# Altium PCB hat_template 2021V3.PcbDoc (part 2 of 2)
Units mm, origin at the board's own origin, x right, y up, seen from the top; angles counter-clockwise.
Board outline 64 x 85 mm, 4 copper layers (Top Side, Ground Plane, Power Plane, Bottom Side), stack 0.844 mm thick; 109 components, 93 nets, 378 pads, 126 vias.
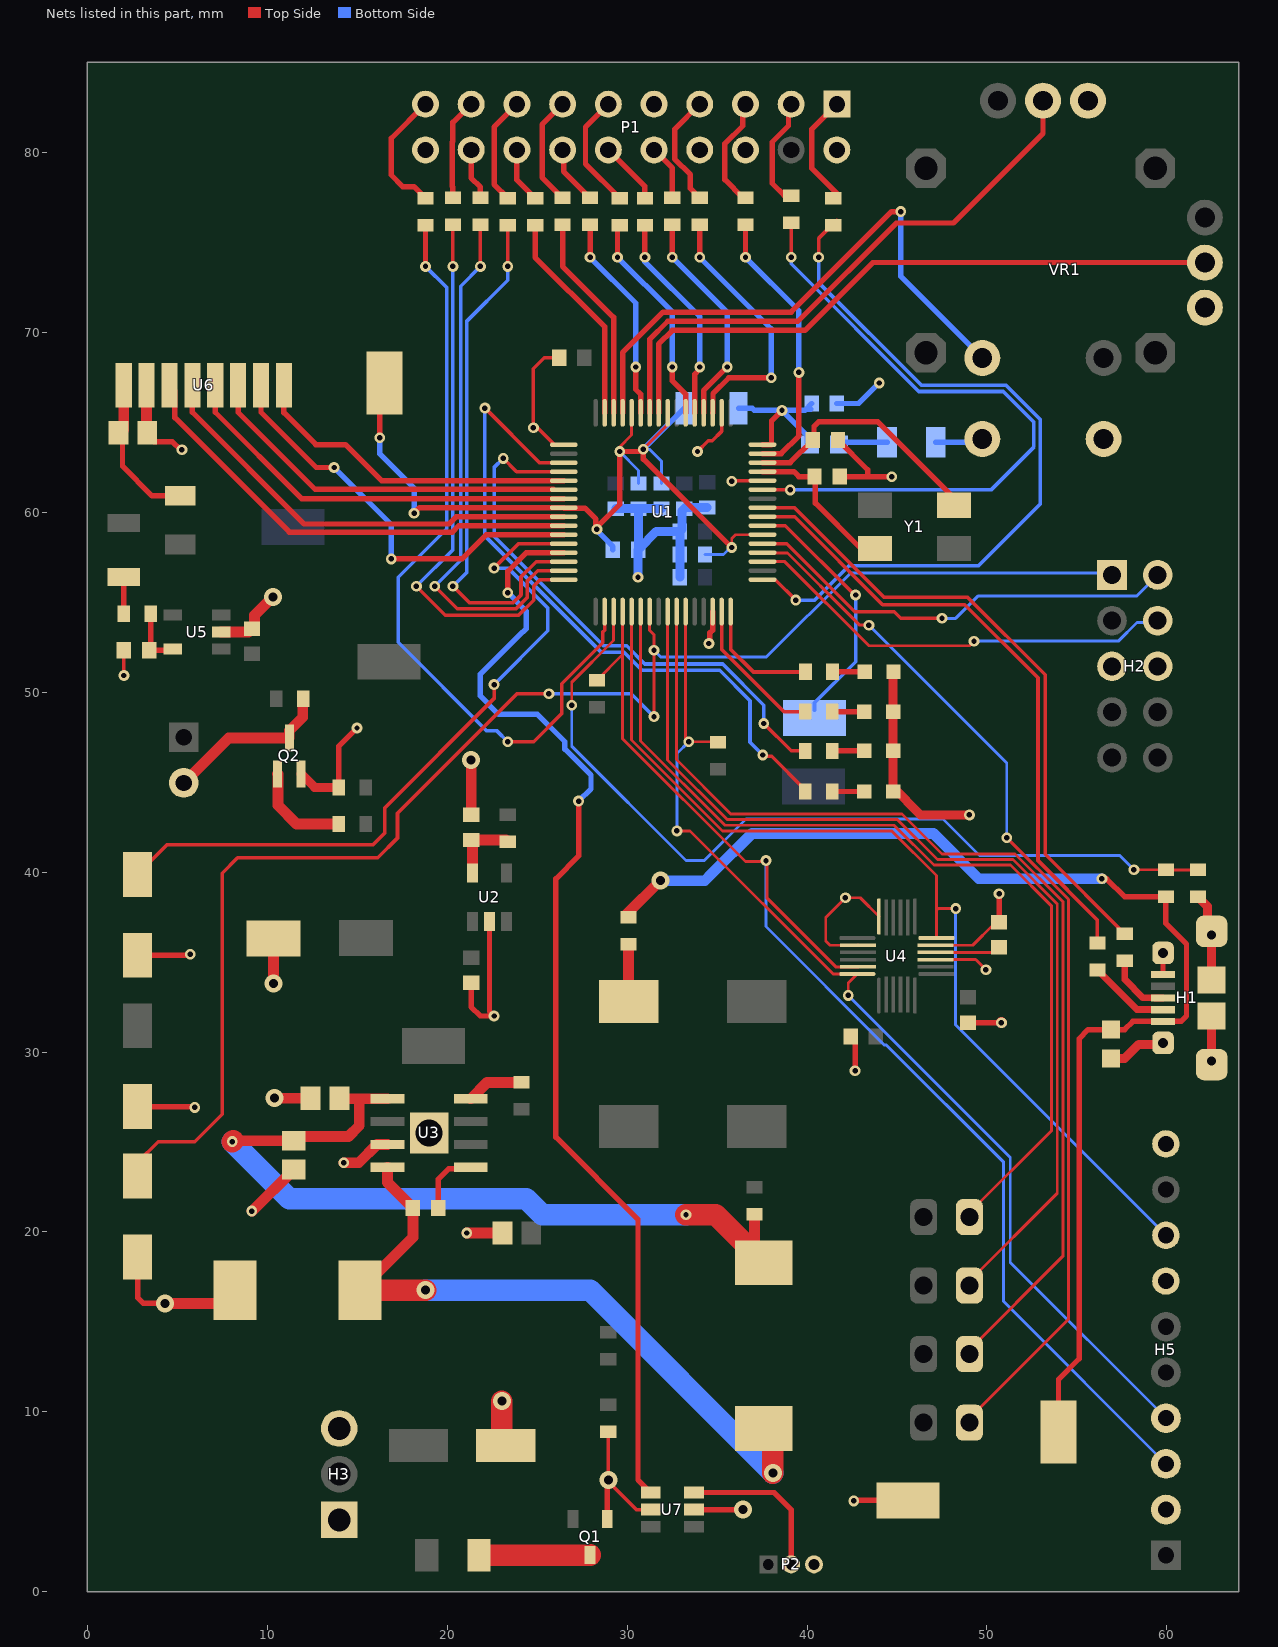
[diagram p4: the nets of this part, all layers, seen from the top]

## Via types
v1: diameter 0.6, hole 0.3, Top Side to Bottom Side, 102 vias
v2: diameter 1, hole 0.5, Top Side to Bottom Side, 22 vias
v3: diameter 1.3, hole 1.1, Top Side to Bottom Side, 1 vias
v4: diameter 2, hole 1.5, Top Side to Bottom Side, 1 vias

## Nets (pads, with @x,y where several pads share a name; then routed paths per layer and width w, separated by ;. In a path a pad name is that pad's centre, name@x,y a point inside that pad or via, vN(x,y) a via of type N, cw(c..) or ccw(c..) an arc to the next point about the centre after c; other vN are vias at no path point) (continued)
CE_RF24: U1.26 U6.3 | length 26.3
  Top Side w0.3: U6.3@4.566,67.056 4.866,66.756 4.866,65.256 11.228,58.894 20.286,58.894 20.642,59.25 U1.26@26.475,59.25
CH1_RF24: J1.1 U1.52 | length 58.8
  Top Side w0.16: U1.52@37.525,57.75 37.535,57.74 38.907,57.74 42.515,54.132 42.926,53.721 v1(43.434,53.721) ; J1.1@49.026,9.398 49.026,9.648 54.524,15.146 54.524,38.485 v1(51.099,41.91)
  Bottom Side w0.16: v1(43.434,53.721) 51.099,46.056 v1(51.099,41.91)
CH2_RF24: J2.1 U1.42 | length 60.3
  Top Side w0.16: U1.42@32.75,54.475 32.75,51.124 32.744,51.118 32.744,46.25 35.758,43.236 45.268,43.236 47.498,41.006 51.565,41.006 54.214,38.357 54.214,18.646 49.026,13.458 J2.1@49.026,13.208
CH3_RF24: J3.1 U1.41 | length 56.4
  Top Side w0.16: U1.41@32.25,54.475 32.25,46.236 35.56,42.926 45.014,42.926 47.244,40.696 51.436,40.696 53.904,38.228 53.904,22.146 49.026,17.268 J3.1@49.026,17.018
CH4_RF24: J4.1 U1.38 | length 53
  Top Side w0.16: U1.38@30.75,54.475 30.75,47.285 35.434,42.601 44.832,42.601 47.047,40.386 51.308,40.386 53.594,38.1 53.594,25.646 49.026,21.078 J4.1@49.026,20.828
CSN_RF24: U1.25 U6.4 | length 24.9
  Top Side w0.3: U6.4@5.838,67.056 5.838,65.556 12.05,59.344 20.1,59.344 20.506,59.75 U1.25@26.475,59.75
D_N: H1.2 R2.1 | length 4.6
  Top Side w0.381: R2.1@56.134,34.556 58.327,32.363 59.775,32.363 H1.2@59.784,32.354
D_P: H1.3 R1.1 | length 3.6
  Top Side w0.381: R1.1@57.658,35.064 57.658,34.03 58.674,33.014 59.325,33.014 59.334,33.004 H1.3@59.784,33.004
DEBUG: R33.1 U1.19 | length 37.8
  Top Side w0.2: v1(22.098,65.786) 25.146,62.738 26.463,62.738 U1.19@26.475,62.75 ; v1(37.541,46.507) 37.618,46.431 38.035,46.431 39.89,44.575 R33.1@39.89,44.475
  Bottom Side w0.2: v1(22.098,65.786) 22.098,58.674 28.544,52.228 29.814,52.228 30.83,51.212 35.148,51.212 36.83,49.53 36.83,47.219 v1(37.541,46.507)
ERROR: R18.1 U1.20 | length 31
  Top Side w0.2: v1(23.114,62.992) 23.856,62.25 U1.20@26.475,62.25 ; v1(37.592,48.26) 39.116,46.736 R18.1@39.89,46.736
  Bottom Side w0.2: v1(23.114,62.992) 22.606,62.484 22.606,58.661 28.689,52.578 29.972,52.578 30.988,51.562 35.306,51.562 37.592,49.276 v1(37.592,48.26)
GND: C1.1 C2.1 C3.1 C4.1 C5.1 C6.1 C7.1 C8.1 C9.1 C10.1 C12.2 C13.2 C14.2 C15.2 C16.1 C17.1 C18.1 C20.2 C21.2 C22.2 C23.1 C24.1 C25.1 C26.1 C27.1 C28.1 C29.1 D1.1 DL1.1 DL2.1 DL3.1 DL4.1 H1.5 H1.6 H2.5 H2.6 H3.1 H3.3 H5.2 H5.7 H5.10 P1.2 P1.6 P1.8 P1.9 P1.20 P2.3 Q1.1 Q2.2 R4.1 R5.1 R14.1 R20.1 S1.2 S2.2 S3.2 TP6.1 U1.2 U1.17 U1.46 U1.60 U2.2 U3.7 U3.EPAD U4.9 U4.11 U4.18 U4.20 U5.2 U6.2 U7.2 U7.5 VR1.3 VR1.6 VR1.8 VR1.9 | length 154.1
  Top Side w0.16: C20.2@42.418,30.861 C20.2@42.672,30.607 ; U4.20@42.823,35.955 U4.20@42.843,35.935 41.269,35.935 41.04,36.164 41.04,37.484 v1(42.129,38.573) 42.955,38.573 U4.18@43.993,37.535 ; U4.9@47.143,35.135 49.371,35.135 v1(49.936,34.569) ; U4.11@47.143,35.935 49.205,35.935 50.354,37.084 C22.2@50.546,37.084
  Top Side w0.2: v1(2.032,50.927) C23.1@2.032,52.324 ; C26.1@26.224,68.58 25.4,68.58 24.79,67.97 v1(24.79,64.694) 25.018,64.694 25.963,63.75 U1.17@26.475,63.75 ; v2@28.89,6.062 v2@28.956,6.128 ; R20.1@28.956,8.902 v2@28.956,6.128 ; U7.5@31.312,4.572 30.512,4.572 v2@28.956,6.128 ; v1(33.909,63.373) 34.506,63.97 34.73,63.97 35.25,64.49 U1.2@35.25,65.525 ; v1(35.814,61.722) 35.842,61.75 U1.60@37.525,61.75
  Top Side w0.3: S1.2@2.794,18.614 2.794,16.352 3.118,16.027 v2(4.318,16.027) ; S2.2@2.794,26.96 5.933,26.96 v1(5.969,26.924) ; S3.2@2.794,35.378 5.66,35.378 v1(5.715,35.433) ; C25.1@3.556,64.516 3.556,64.086 3.727,63.914 4.737,63.914 5.177,63.475 v1(5.258,63.475) ; v2(10.338,33.807) v2@10.342,33.812 ; R14.1@13.982,44.704 13.982,47.002 v1(14.986,48.006) ; H3.3@14,9.08 H3.3@14.11,9.08 ; C1.1@21.336,33.844 21.336,32.512 21.844,32.004 v1(22.606,32.004) 22.352,32.258 U2.2@22.352,37.258 ; Q1.1@28.89,4.048 v2@28.89,6.062 ; U7.2@33.712,4.572 v2(36.449,4.572) ; v1(34.544,52.705) 34.601,52.762 34.601,53.291 34.75,53.44 U1.46@34.75,54.475 ; C4.1@41.594,61.976 43.372,61.976 ; C3.1@41.721,64.008 43.372,62.357 43.372,61.976 ; v1(42.596,5.055) 42.621,5.08 TP6.1@45.618,5.08 ; v1(42.672,28.956) C20.2@42.672,30.607 ; C21.2@48.946,31.634 v1@50.789,31.634 ; C22.2@50.673,37.214 v1(50.673,38.8) ; H1.5@59.784,34.304 H1.6@59.784,35.504 ; 43.372,61.976 v1(44.704,61.976) 43.372,61.976
  Top Side w0.5: Q2.2@11.877,45.457 12.629,44.704 R14.1@13.982,44.704 ; DL1.1@44.78,50.8 DL2.1@44.78,48.92 DL3.1@44.78,46.736 44.78,44.704 46.304,43.18 v1(49.022,43.18) ; C16.1@56.896,29.642 57.646,29.642 58.434,30.43 59.71,30.43 H1.6@59.784,30.504 ; R4.1@61.722,38.62 62.249,38.093 62.249,36.739 H1.6@62.484,36.504 H1.6@62.484,34.004 ; H1.6@62.484,29.504 H1.6@62.484,32.004
  Top Side w0.6: U6.2@3.295,67.056 3.295,64.777 C25.1@3.556,64.516 ; v2(4.318,16.027) 7.472,16.027 D1.1@8.209,16.764 ; U5.2@7.446,53.34 8.952,53.34 C24.1@9.144,53.532 9.194,53.532 9.294,53.632 9.294,54.277 v2(10.312,55.296) ; v1(9.144,21.158) 9.169,21.158 C27.1@11.481,23.47 ; v2@10.342,33.812 C29.1@10.342,36.3 ; v2(10.414,27.432) C18.1@12.408,27.432 ; v1(14.249,23.851) 15.08,23.851 16.095,24.865 U3.7@16.689,24.865 ; v1(21.082,19.939) C17.1@23.076,19.939 ; C2.1@21.336,43.18 v2(21.336,46.228) ; v1@50.789,31.634 v1(50.8,31.623)
  Top Side w1.2: v2(23.038,10.592) 23.038,8.343 C28.1@23.253,8.128
  Bottom Side w0.16: VR1.9@50.033,63.754 VR1.9@50.232,63.953
  Bottom Side w0.3: C10.1@41.659,66.04 42.864,66.04 v1(44.007,67.183) ; R5.1@47.15,63.881 VR1.9@49.957,63.881
  Bottom Side w0.5: C6.1@29.369,60.198 C13.2@30.639,60.198 ; v1(30.607,56.388) 30.61,56.391 C14.2@30.61,57.912 C14.2@30.639,57.941 ; C12.2@31.909,60.198 C13.2@30.639,60.198 ; C7.1@32.925,56.388 C15.2@32.925,57.658 C8.1@32.925,58.928 ; C9.1@34.449,60.26 33.241,60.26 C5.1@33.179,60.198 33.052,60.071 33.052,59.055 C8.1@32.925,58.928 ; C14.2@30.639,57.941 31.626,58.928 C8.1@32.925,58.928 ; C14.2@30.639,57.941 C13.2@30.639,60.198
  other v2: 28.956,6.223
  other v4: 19,25.5
INT_IMU: H5.8 U1.37 U4.12 | length 54.8
  Top Side w0.16: U1.37@30.25,54.475 30.25,47.347 35.306,42.291 44.704,42.291 47.193,39.802 47.193,37.878 ; U4.12@47.193,36.335 47.193,37.878 ; v1(48.26,37.973) 47.288,37.973 47.193,37.878
  Bottom Side w0.16: v1(48.26,37.973) 48.26,31.496 H5.8@59.944,19.812
IRQ_RF24: U1.21 U6.8 | length 19
  Top Side w0.3: U6.8@11.176,66.803 U6.8@10.923,67.056 10.923,65.531 12.7,63.754 14.351,63.754 16.355,61.75 U1.21@26.475,61.75
JOY_STICK_BUTTON: U1.13 VR1.10 | length 32.3
  Top Side w0.3: U1.13@29.75,65.525 29.75,68.866 32.004,71.12 39.116,71.12 44.704,76.708 v1(45.212,76.708)
  Bottom Side w0.3: v1(45.212,76.708) 45.212,73.099 VR1.10@49.74,68.571 ; VR1.10@50.156,68.58 VR1.10@50.156,68.843
JOY_STICK_X: U1.10 VR1.2 | length 32.6
  Top Side w0.3: U1.10@31.25,65.525 31.25,69.604 32.258,70.612 39.497,70.612 44.958,76.073 48.133,76.073 53.11,81.05 VR1.2@53.11,82.871 ; VR1.2@53.49,82.844 VR1.2@53.526,82.88
  Bottom Side w0.3: VR1.2@53.602,82.681 VR1.2@53.602,82.753
JOY_STICK_Y: U1.9 VR1.5 | length 36.1
  Top Side w0.3: U1.9@31.75,65.525 31.75,69.342 32.512,70.104 39.878,70.104 43.654,73.88 62.101,73.88 VR1.5@62.11,73.871
LED_STRIP: U1.29 U7.4 | length 63
  Top Side w0.3: v1(23.368,55.527) 23.368,56.718 24.4,57.75 U1.29@26.475,57.75 ; v1(27.305,43.942) 27.305,40.894 26.035,39.624 26.035,25.273 30.607,20.701 30.607,6.227 U7.4@31.312,5.522
  Bottom Side w0.3: v1(23.368,55.527) 24.384,54.511 24.384,53.516 24.208,53.34 24.187,53.34 21.844,50.997 21.844,49.784 22.86,48.768 25.019,48.768 26.544,47.243 26.544,46.833 27.992,45.385 27.992,44.629 v1(27.305,43.942)
LOW_BAT_LED: R30.1 U1.47 | length 8.2
  Top Side w0.2: U1.47@35.25,54.475 35.25,52.38 38.722,48.908 39.877,48.908 R30.1@39.89,48.92
MISO: U1.27 U6.7 | length 23.4
  Top Side w0.3: U6.7@9.652,67.056 9.652,65.556 12.724,62.484 v1(13.716,62.484) ; v1(16.891,57.404) 20.828,57.404 22.174,58.75 U1.27@26.475,58.75
  Bottom Side w0.3: v1(13.716,62.484) 16.891,59.309 v1(16.891,57.404)
MOSI: U1.22 U6.6 | length 20.8
  Top Side w0.3: U6.6@8.381,67.056 8.381,65.556 12.662,61.275 U1.22@25.908,61.275
NetC2_2: C2.2 R6.1 U2.5 | length 3.9
  Top Side w0.3: C2.2@21.336,41.78 C2.2@21.402,41.714 ; R6.1@23.268,41.78 R6.1@23.368,41.68
  Top Side w0.6: C2.2@21.336,41.78 R6.1@23.268,41.78 ; U2.5@21.402,39.958 C2.2@21.402,41.714
NetC3_2: C3.2 U1.62 Y1.3 | length 14.2
  Top Side w0.3: U1.62@37.525,62.75 39.063,62.75 C3.2@40.321,64.008 40.386,64.073 40.386,64.77 40.64,65.024 43.942,65.024 48.174,60.792 Y1.3@48.174,60.382
NetC4_2: C4.2 U1.61 Y1.1 | length 8.9
  Top Side w0.3: U1.61@37.525,62.25 39.27,62.25 39.544,61.976 40.462,61.976 40.462,60.503 42.983,57.982 Y1.1@43.774,57.982
NetC10_2: C10.2 C11.2 L1.1 U1.64 | length 9.6
  Top Side w0.3: U1.64@37.525,63.75 38,63.75 38.025,63.775 38.025,65.076 v1(38.608,65.659)
  Bottom Side w0.3: L1.1@36.195,65.786 36.945,65.786 37.072,65.659 v1(38.608,65.659) ; C11.2@40.019,63.754 40.019,64.248 v1(38.608,65.659) ; C10.2@40.019,65.731 C10.2@40.194,65.731 ; C10.2@40.259,66.04 39.878,65.659 v1(38.608,65.659)
NetC11_1: C11.1 R5.2 | length 2.9
  Bottom Side w0.3: C11.1@41.619,63.754 41.746,63.881 R5.2@44.45,63.881
NetC12_1: C12.1 C13.1 C14.1 C15.1 L1.2 TP3.1 U1.8 U1.12 U1.24 U1.54 | length 51.3
  Top Side w0.16: v1(29.591,63.373) 29.591,63.627 30.25,64.286 U1.12@30.25,65.525 ; v1(30.899,63.5) 30.899,63.512 32.25,64.863 U1.8@32.25,65.525 ; v1(35.814,58.039) 35.814,58.547 36.017,58.75 U1.54@37.525,58.75
  Top Side w0.3: v1(16.256,64.135) 16.256,66.929 TP3.1@16.51,67.183 ; v1(18.161,59.944) 18.467,60.25 U1.24@26.475,60.25 26.5,60.225 27.659,60.225 28.264,59.62 28.264,59.112 28.297,59.112 28.378,59.194 28.378,59.227 29.591,60.44 v1(29.591,63.373) 30.691,63.373 30.818,63.5 v1(30.899,63.5) 30.899,62.954 v1(35.814,58.039)
  Bottom Side w0.16: v1(29.591,63.373) 30.639,62.325 C13.1@30.639,61.598 ; v1@30.909,63.5 31.242,63.5 31.909,62.833 C12.1@31.909,61.598 ; C15.1@34.325,57.658 35.352,57.658 35.733,58.039 v1(35.814,58.039)
  Bottom Side w0.3: v1(16.256,64.135) 16.256,63.246 18.161,61.341 v1(18.161,59.944) ; v1(28.321,59.055) 28.321,58.974 29.21,58.085 C14.1@29.21,57.912 ; v1(30.899,63.5) 30.909,63.5 L1.2@33.195,65.786
NetC18_2: C18.2 C27.2 L2.2 R12.1 U3.5 | length 46.2
  Top Side w0.3: U3.5@16.662,27.432 U3.5@16.689,27.405
  Top Side w0.6: v1@8.102,25.07 C27.2@11.481,25.07 11.722,25.311 14.516,25.311 15.113,25.908 15.113,27.38 15.138,27.405 ; C18.2@14.008,27.432 14.035,27.405 15.138,27.405 ; U3.5@16.689,27.405 15.138,27.405 ; L2.2@37.084,18.796 R12.1@37.084,20.979
  Top Side w1.2: v1(8.052,25.019) v1@8.102,25.07 ; v1(33.274,20.955) 34.925,20.955 37.084,18.796 L2.2@37.592,18.288
  Bottom Side w1.2: v1(8.052,25.019) 11.227,21.844 24.384,21.844 25.273,20.955 v1(33.274,20.955)
NetC19_1: C19.1 U3.1 | length 3.7
  Top Side w0.3: C19.1@19.496,21.336 19.496,22.925 20.091,23.52 21.237,23.52 U3.1@21.311,23.595
NetC19_2: C19.2 D1.2 L2.1 U3.8 | length 38.5
  Top Side w0.6: D1.2@15.159,16.764 18.096,19.701 C19.2@18.096,21.336 16.689,22.743 U3.8@16.689,23.595
  Top Side w1.2: D1.2@15.159,16.764 v2(18.796,16.764) ; L2.1@37.592,9.088 38.1,8.58 v2(38.1,6.604)
  Bottom Side w1.2: v2(18.796,16.764) 27.94,16.764 v2(38.1,6.604)
NetC22_1: C22.1 U4.10 | length 3.4
  Top Side w0.16: U4.10@47.163,35.515 U4.10@47.143,35.535 C22.1@50.546,35.535
NetC23_2: C23.2 R34.1 U5.5 | length 3.4
  Top Side w0.3: R34.1@3.532,54.356 3.532,52.424 C23.2@3.432,52.324 4.68,52.324 U5.5@4.746,52.39
NetC25_2: C25.2 R11.1 U6.1 | length 8.5
  Top Side w0.3: C25.2@1.956,64.516 1.956,62.56 3.603,60.913 R11.1@5.156,60.913 R11.1@5.08,60.989
  Top Side w0.6: C25.2@1.956,64.516 2.023,64.583 U6.1@2.023,67.056
NetD2_1: D2.1 R31.2 | length 3.3
  Top Side w0.6: R31.2@30.074,35.992 30.074,33.142 29.921,32.99 D2.1@30.099,32.812
NetDL1_2: DL1.2 R24.2 | length 1.8
  Top Side w0.3: R24.2@41.415,51.13 DL1.2@43.205,51.13
NetDL2_2: DL2.2 R30.2 | length 1.8
  Top Side w0.3: R30.2@41.39,48.92 DL2.2@43.18,48.92
NetDL3_2: DL3.2 R18.2 | length 1.8
  Top Side w0.3: R18.2@41.39,46.736 DL3.2@43.18,46.736
NetDL4_2: DL4.2 R33.2 | length 1.8
  Top Side w0.3: R33.2@41.39,44.475 DL4.2@43.18,44.475
NetF1_2: F1.2 Q1.3 | length 6.2
  Top Side w1.2: F1.2@21.77,2.032 27.924,2.032 Q1.3@27.94,2.048
NetH4_2: H4.2 Q2.3 R13.1 | length 9.2
  Top Side w0.6: H4.2@5.359,44.958 7.858,47.457 Q2.3@11.227,47.457 11.227,47.857 11.977,48.607 R13.1@11.977,49.454
NetL3_1: L3.1 R34.2 | length 2.1
  Top Side w0.3: R34.2@2.032,54.356 L3.1@2.032,56.412
NetP1_1: P1.1 R7.2 | length 6.1
  Top Side w0.3: R7.2@41.656,77.724 40.259,79.121 40.259,81.28 P1.1@41.656,82.677
NetP1_3: P1.3 R16.2 | length 6.2
  Top Side w0.3: R16.2@39.116,77.597 38.735,77.597 38.066,78.266 38.066,80.572 38.971,81.477 38.971,82.532 P1.3@39.116,82.677
NetP1_5: P1.5 R17.2 | length 6.2
  Top Side w0.3: R17.2@36.576,77.47 36.449,77.47 35.433,78.486 35.433,80.479 36.431,81.477 36.431,82.532 P1.5@36.576,82.677
NetP1_7: P1.7 R19.2 | length 6.4
  Top Side w0.3: R19.2@34.036,77.47 33.509,77.997 33.509,78.76 32.639,79.63 32.639,81.28 P1.7@34.036,82.677
NetP1_10: P1.10 R23.1 | length 3.1
  Top Side w0.3: P1.10@31.496,80.137 32.512,79.121 R23.1@32.512,77.47
NetP1_11: P1.11 R25.2 | length 6.5
  Top Side w0.3: P1.11@28.956,82.677 27.686,81.407 27.686,79.363 R25.2@29.591,77.458
NetP1_12: P1.12 R21.1 | length 3.5
  Top Side w0.3: P1.12@28.956,80.137 30.988,78.105 R21.1@30.988,77.458
NetP1_13: P1.13 R26.2 | length 6.2
  Top Side w0.3: R26.2@26.416,77.47 25.273,78.613 25.273,81.534 P1.13@26.416,82.677
NetP1_14: P1.14 R35.1 | length 3.3
  Top Side w0.3: P1.14@26.416,80.137 26.473,80.08 26.473,78.937 R35.1@27.94,77.47
NetP1_15: P1.15 R27.2 | length 6.3
  Top Side w0.3: R27.2@23.402,77.492 R27.2@23.368,77.458 22.606,78.22 22.606,81.407 P1.15@23.876,82.677 P1.15@24.021,82.532
NetP1_16: P1.16 R36.1 | length 3.1
  Top Side w0.3: P1.16@23.876,80.137 23.876,78.474 R36.1@24.892,77.458
NetP1_17: P1.17 R28.2 | length 5.7
  Top Side w0.3: R28.2@20.32,77.47 20.32,78.07 20.286,78.104 20.286,80.572 20.32,80.606 20.32,81.661 P1.17@21.336,82.677
NetP1_18: P1.18 R37.1 | length 2.9
  Top Side w0.3: P1.18@21.336,80.137 21.336,78.578 21.844,78.07 R37.1@21.844,77.47
NetP1_19: P1.19 R29.2 | length 7.2
  Top Side w0.3: R29.2@18.796,77.458 18.157,78.097 17.518,78.097 17.518,78.113 16.891,78.74 16.891,80.772 P1.19@18.796,82.677
NetP2_2: P2.2 U7.3 | length 8.8
  Top Side w0.3: U7.3@33.712,5.522 38.166,5.522 39.116,4.572 P2.2@39.116,1.524
NetQ2_1: Q2.1 R15.2 | length 5.6
  Top Side w0.6: Q2.1@10.577,45.457 10.592,45.442 10.592,43.713 11.633,42.672 R15.2@13.982,42.672
NetR1_2: R1.2 U1.57 | length 35.8
  Top Side w0.2: U1.57@37.525,60.25 39.305,60.25 44.291,55.264 48.934,55.264 53.232,50.966 53.232,40.99 R1.2@57.658,36.564
NetR2_2: R2.2 U1.56 | length 35.1
  Top Side w0.2: U1.56@37.525,59.75 39.31,59.75 44.196,54.864 48.768,54.864 52.832,50.8 52.832,40.644 56.134,37.342 R2.2@56.134,36.056
NetR8_2: R8.2 U3.4 | length 3.2
  Top Side w0.6: U3.4@21.311,27.405 22.215,28.309 R8.2@24.13,28.309
NetTP2_1: TP2.1 U1.55 | length 14.1
  Top Side w0.2: U1.55@37.525,59.25 38.794,59.25 42.647,55.397 v1(42.697,55.397)
  Bottom Side w0.2: TP2.1@40.411,49.009 40.411,49.403 42.697,51.689 v1(42.697,55.397)
nRST: H2.1 S1.1 U1.39 | length 83
  Top Side w0.16: U1.39@31.25,54.475 31.25,53.44 31.496,53.194 v1(31.496,52.324) v1(31.496,48.641)
  Top Side w0.2: S1.1@2.794,23.114 2.794,23.876 3.937,25.019 5.969,25.019 7.493,26.543 7.493,39.94 8.351,40.798 16.147,40.798 17.241,41.892 17.241,43.276 23.876,49.911 v1(25.654,49.911)
  Bottom Side w0.16: v1(31.496,52.324) 31.877,51.943 37.719,51.943 42.432,56.628 56.834,56.628 H2.1@56.947,56.515
  Bottom Side w0.2: v1(25.654,49.911) 30.226,49.911 v1(31.496,48.641)
PA6: R29.1 U1.34 | length 43.5
  Top Side w0.2: v1(23.368,47.244) 24.808,47.244 26.374,48.81 26.374,50.463 28.65,52.739 28.65,53.34 28.75,53.44 U1.34@28.75,54.475
  Top Side w0.3: v1(18.796,73.66) R29.1@18.796,75.958
  Bottom Side w0.2: v1(18.796,73.66) 19.97,72.486 19.97,59.086 17.272,56.388 17.272,52.773 22.199,47.845 22.767,47.845 v1(23.368,47.244)
PA7: R28.1 U1.32 | length 31.1
  Top Side w0.2: v1(18.288,55.88) 19.891,54.277 23.968,54.277 24.805,55.114 24.805,55.894 25.16,56.25 U1.32@26.475,56.25 ; v1(20.32,73.66) R28.1@20.32,75.97
  Bottom Side w0.2: v1(18.288,55.88) 20.32,57.912 v1(20.32,73.66)
PA8: R37.2 U1.31 | length 30.3
  Top Side w0.2: v1(19.304,55.88) 20.557,54.627 23.823,54.627 24.455,55.259 24.455,56.179 25.025,56.75 U1.31@26.475,56.75 ; v1(21.844,73.66) R37.2@21.844,75.97
  Bottom Side w0.2: v1(19.304,55.88) 20.748,57.324 20.748,72.564 v1(21.844,73.66)
PA9: R27.1 U1.30 | length 29.4
  Top Side w0.2: v1(20.32,55.88) 21.223,54.977 23.678,54.977 24.105,55.404 24.105,56.41 24.944,57.25 U1.30@26.475,57.25 U1.30@26.465,57.24 ; v1(23.368,73.66) R27.1@23.368,75.958
  Bottom Side w0.2: v1(20.32,55.88) 21.098,56.658 21.098,70.628 23.368,72.898 v1(23.368,73.66)
PA21: R35.2 U1.11 | length 11.6
  Top Side w0.3: v1(27.94,74.168) R35.2@27.94,75.97 ; v1(30.48,68.072) 30.48,66.83 30.75,66.56 U1.11@30.75,65.525
  Bottom Side w0.3: v1(27.94,74.168) 30.48,71.628 v1(30.48,68.072)
PA22: R26.1 U1.14 | length 11.6
  Top Side w0.3: R26.1@26.416,75.97 26.416,73.66 29.25,70.826 U1.14@29.25,65.525
PA23: R36.2 U1.15 | length 12
  Top Side w0.3: R36.2@24.892,75.958 24.892,74.168 28.75,70.31 U1.15@28.75,65.525
PB0: R19.1 U1.3 | length 14.9
  Top Side w0.3: v1(34.036,74.168) 34.036,75.716 34.163,75.843 R19.1@34.036,75.97 ; U1.3@34.75,65.525 34.775,65.55 34.775,66.589 35.658,67.472 v1(38.008,67.472)
  Bottom Side w0.3: v1(34.036,74.168) 38.008,70.196 v1(38.008,67.472)
PB1: R23.2 U1.4 | length 12.3
  Top Side w0.3: v1(32.512,74.168) R23.2@32.512,75.97 ; U1.4@34.25,65.525 34.25,66.762 v1(35.56,68.072)
  Bottom Side w0.3: v1(32.512,74.168) 35.56,71.12 v1(35.56,68.072)
PB2: R21.2 U1.5 | length 11.9
  Top Side w0.3: v1(30.988,74.168) 30.988,75.704 30.861,75.831 R21.2@30.988,75.958 ; U1.5@33.75,65.525 33.75,67.659 34.036,67.945 v1(34.036,68.072)
  Bottom Side w0.3: v1(30.988,74.168) 30.988,73.914 34.036,70.866 v1(34.036,68.072)
PB3: R25.1 U1.6 | length 12.1
  Top Side w0.3: v1(29.464,74.168) 29.464,75.831 R25.1@29.591,75.958 ; v1(32.512,68.072) 32.512,67.298 33.25,66.56 U1.6@33.25,65.525
  Bottom Side w0.3: v1(29.464,74.168) 32.512,71.12 v1(32.512,68.072)
PB5: R7.1 U1.49 | length 42.2
  Top Side w0.2: U1.49@37.525,56.25 38.238,56.25 v1(39.37,55.118) ; v1(40.64,74.168) 40.64,75.208 R7.1@41.656,76.224
  Bottom Side w0.2: v1(39.37,55.118) 40.427,55.118 42.332,57.023 49.53,57.023 52.959,60.452 52.959,65.151 51.054,67.056 46.355,67.056 40.64,72.771 v1(40.64,74.168)
PB13: R16.1 U1.59 | length 36.9
  Top Side w0.2: U1.59@37.525,61.25 39.055,61.25 v1(39.065,61.239) ; v1(39.116,74.168) 39.116,76.041 39.144,76.069 R16.1@39.116,76.097
  Bottom Side w0.2: v1(39.065,61.239) 50.221,61.239 52.609,63.627 52.609,65.006 50.909,66.706 46.21,66.706 39.116,73.8 v1(39.116,74.168)
PB14: R17.1 U1.63 | length 15.4
  Top Side w0.3: v1(36.576,74.168) R17.1@36.576,75.97 ; U1.63@37.525,63.25 38.564,63.25 39.548,64.234 v1(39.548,67.767)
  Bottom Side w0.3: v1(36.576,74.168) 39.548,71.196 v1(39.548,67.767)
SCK: U1.23 U6.5 | length 22.9
  Top Side w0.3: U6.5@7.109,67.056 7.109,65.556 11.915,60.75 U1.23@26.475,60.75
SCL: H5.3 R9.1 U1.36 U4.23 | length 71.5
  Top Side w0.16: R9.1@28.321,50.661 29.75,52.09 ; U1.36@29.75,54.475 29.75,52.09 ; U4.23@42.843,34.735 41.592,34.735 37.782,38.544 37.782,40.576 v1(37.719,40.64) 37.662,40.583 36.576,40.583 29.75,47.409 29.75,52.09
  Bottom Side w0.16: v1(37.719,40.64) 37.719,36.969 44.308,30.381 44.422,30.381 50.927,23.876 50.927,16.129 H5.3@59.944,7.112
SDA: H5.4 R10.1 U1.43 U4.24 | length 59.7
  Top Side w0.16: v1(32.766,42.291) 33.503,42.291 41.458,34.335 U4.24@42.793,34.335 42.291,33.833 v1(42.291,33.147) ; U1.43@33.274,54.451 U1.43@33.25,54.475 33.25,47.422 v1(33.428,47.244) 35.028,47.244 R10.1@35.052,47.22
  Bottom Side w0.16: v1(32.766,42.291) 32.766,46.582 v1(33.428,47.244) ; v1(42.291,33.147) 51.292,24.146 51.292,18.304 H5.4@59.944,9.652
SLEEP: S3.1 U1.28 | length 39.3
  Top Side w0.2: S3.1@2.794,39.878 4.445,41.529 15.888,41.529 16.541,42.182 16.541,43.579 22.606,49.644 v1(22.606,50.419) ; v1(22.606,56.896) 23.96,58.25 U1.28@26.475,58.25
  Bottom Side w0.2: v1(22.606,50.419) 25.597,53.41 25.597,54.68 23.381,56.896 v1(22.606,56.896)
STATUS_LED: R24.1 U1.48 | length 6.9
  Top Side w0.16: R24.1@39.903,51.13 R24.1@39.968,51.195
  Top Side w0.2: U1.48@35.75,54.475 35.75,52.388 37.02,51.117 39.903,51.117 R24.1@39.915,51.13 R24.1@39.903,51.13
SWCLK: H2.2 U1.53 | length 24.7
  Top Side w0.2: U1.53@37.525,58.25 38.864,58.25 42.651,54.462 44.84,54.462 45.201,54.102 v1(47.498,54.102)
  Bottom Side w0.16: v1(47.498,54.102) 48.26,54.102 49.491,55.333 58.305,55.333 H2.2@59.487,56.515
SWDIO: H2.4 U1.51 | length 24.5
  Top Side w0.16: U1.51@37.525,57.25 38.762,57.25 43.434,52.578 49.022,52.578 v1(49.276,52.832)
  Bottom Side w0.16: v1(49.276,52.832) 57.296,52.832 58.332,53.868 59.38,53.868 H2.4@59.487,53.975
USB_DETECT: R3.1 R4.2 U1.35 | length 48
  Top Side w0.16: v1(26.924,49.276) 26.924,50.546 29.25,52.872 U1.35@29.25,54.475 ; v1(58.166,40.132) 59.932,40.132 R3.1@59.944,40.12 R4.2@61.722,40.12
  Bottom Side w0.16: v1(26.924,49.276) 26.924,46.99 33.274,40.64 34.29,40.64 36.601,42.951 47.549,42.951 49.581,40.919 57.379,40.919 v1(58.166,40.132)
VBUS: C16.2 H1.1 R3.2 R31.1 TP7.1 | length 69.4
  Top Side w0.3: TP7.1@53.975,8.89 53.975,11.811 55.118,12.954 55.118,30.734 55.626,31.242 C16.2@56.896,31.242 57.646,31.242 58.108,31.704 H1.1@59.784,31.704 60.787,31.704 61.087,32.004 61.087,36.001 59.944,37.144 R3.2@59.944,38.62 57.658,38.62 56.654,39.624 v1(56.388,39.624)
  Top Side w0.6: R31.1@30.111,37.529 R31.1@30.074,37.492 30.074,37.55 29.972,37.652 31.842,39.522 v2(31.852,39.522)
  Bottom Side w0.6: v2(31.852,39.522) 34.315,39.522 34.706,39.913 36.935,42.142 47.024,42.142 49.542,39.624 v1(56.388,39.624)
pads on no net: H1.4 H2.3 H2.9 H2.10 H5.5 H5.6 U1.40 U1.50 U2.4 U3.6 U4.2 U4.3 U4.4 U4.5 U4.6 U4.7 U4.14 U4.15 U4.16 U4.17 U4.19 U4.21 U5.4 VR1.7 VR1.11 VR1.12 VR1.13 VR1.14 Y1.2 Y1.4
copper on no net:
  other v3: 44.993,35.335

## Polygon pours and split planes (outlines as drawn)
VBUS on Power Plane (split plane): 63.49,27.815 56.696,27.815 54.739,29.772 54.739,39.824 56.188,41.273 63.49,41.273
no net on Power Plane (split plane): 6.858,77.634 6.858,75.565 4.205,84.49 13.714,84.49
5V on Power Plane (split plane): 25.308,43.088 25.35,43.06 25.39,43.052 25.39,40.622 25.4,40.572 25.428,40.53 27.188,38.77 27.23,38.742 27.28,38.733 35.379,38.733 41.146,32.966 41.146,22.787 40.713,22.354 29.645,22.354 26.635,25.365 26.593,25.393 26.581,25.395 26.581,30.953 26.571,31.002 26.543,31.044 24.476,33.112 24.434,33.14 24.384,33.149 17.909,33.149 17.909,35.944 18.786,36.821 18.814,36.863 18.824,36.912 18.824,43.736 19.662,44.575 23.822,44.575
BAT on Power Plane (split plane): 25.779,12.138 25.779,0.51 0.51,0.51 0.51,13.079 24.838,13.079
5V on Power Plane (split plane): 13.968,54.937 13.968,52.124 12.773,50.929 0.51,50.929 0.51,56.767 12.138,56.767
3V3 on Power Plane (split plane): 63.49,41.531 56.134,41.531 56.084,41.522 56.042,41.494 54.518,39.97 54.49,39.928 54.481,39.878 54.481,29.718 54.49,29.668 54.518,29.626 56.55,27.594 56.592,27.566 56.642,27.557 63.49,27.557 63.49,0.51 26.037,0.51 26.037,12.192 26.028,12.242 26,12.284 24.984,13.3 24.942,13.328 24.892,13.337 0.51,13.337 0.51,50.671 12.827,50.671 12.877,50.68 12.919,50.708 14.189,51.978 14.217,52.02 14.226,52.07 14.226,54.991 14.217,55.041 14.189,55.083 12.284,56.988 12.242,57.016 12.192,57.025 0.51,57.025 0.51,69.213 10.165,69.213 10.215,69.222 10.257,69.25 10.285,69.292 10.294,69.342 14.095,69.342 14.104,69.292 14.132,69.25 14.174,69.222 14.224,69.213 14.274,69.222 14.316,69.25 14.344,69.292 14.353,69.342 14.353,84.49 63.49,84.49
GND on Ground Plane (split plane): 6.858,77.634 6.858,75.184 6.375,84.49 13.714,84.49
GND on Ground Plane (split plane): 63.49,0.51 0.51,0.51 0.51,69.213 14.224,69.213 14.274,69.222 14.316,69.25 14.344,69.292 14.353,69.342 14.353,84.49 63.49,84.49

## Other copper
Top Side:
  pour cut-out: 7.366,75.438 7.366,78.142 14.224,85 0,85 0,69.779 0.437,69.342 14.097,69.342 14.097,84.873 14.224,85 14.134,85.09 5.842,85.09
Bottom Side:
  pour cut-out: 6.858,75.565 6.858,78.142 0,85 0.053,85.053 14.097,85.053 14.097,69.382 13.93,69.215 0,69.215 0,85 0.09,85.09 8.763,85.09
  pour cut-out: 7.112,77.216
  pour cut-out: 59.944,72.644
Ground Plane (plane layer: these items are gaps in the copper):
  pour cut-out: 6.858,75.184 6.858,77.634 14.224,85 0,85 0,69.215 0.127,69.342 14.097,69.342 14.097,84.873 14.187,84.963 6.35,84.963
  region: 14.057,84.452 14.057,69.255 14.013,69.299
  lines w0.254: 49.752,84.836 64.008,84.836 ; -0.508,69.215 -0.508,85.344 14.224,85.344 14.224,69.342 9.906,69.342 -0.381,69.342 -0.508,69.215
Power Plane (plane layer: these items are gaps in the copper):
  pour cut-out: 6.858,75.565 6.858,77.634 14.224,85 0,85 0,69.215 0.127,69.342 14.097,69.342 14.097,85.053 14.007,84.963 4.064,84.963
  lines w0.254: 10.165,69.342 0,69.342 0,84.836 14.06,84.836 ; 14.224,69.342 14.224,85 ; 25.4,43.18 23.876,44.704 19.609,44.704 18.694,43.79 18.694,36.912 17.78,35.998 17.78,33.02 24.384,33.02 26.451,30.953 26.451,25.181 ; 25.52,43.13 25.52,40.622 27.28,38.862 28.448,38.862 35.433,38.862 41.275,33.02 41.275,22.733 40.767,22.225 29.591,22.225 26.543,25.273 ; 0,0 0,13.208 24.892,13.208 25.908,12.192 25.908,0 0,0 ; 0,50.8 0,56.896 12.192,56.896 14.097,54.991 14.097,52.07 12.827,50.8 0,50.8 ; 54.61,29.718 56.642,27.686 63.616,27.686 64,28.07 64,41.402 56.134,41.402 54.61,39.878 54.61,29.718

## Silkscreen, mask and mechanical layers (free items; w line width, h text height)
Top Overlay:
  text "VDDOUT" at 18.796,65.405 h0.6 r90
  text "BUZZER" at 14.764,53.289 h0.6
  text "status" at 46.66,50.902 h0.6
  text "low_bat" at 46.736,48.666 h0.6
  text "error" at 46.761,46.533 h0.6
  text "debug" at 46.685,44.247 h0.6
  text "5V" at 15.799,30.226 h0.6
  text "VBUS" at 51.41,11.252 h0.6
  text "GND" at 43.618,6.68 h0.6
  text "Group 8 - Hank & Connor" at 41.758,1.041 h0.6
Bottom Overlay:
  lines w0.16: 30.885,65.178 32.106,63.957 33.071,63.957 34.605,63.957 34.773,63.789 34.773,62.484 ; 31.166,54.839 31.471,54.839 31.775,55.143 31.775,57.531 31.928,57.683 32.08,57.683
  text "3V3_Radio" at 13.818,60.757 h0.6
  text "ERASE" at 45.542,48.311 h0.6
  text "3V3" at 44.221,43.942 h0.6
Board Outline:
  the board outline again, w0.254

## Dimensions
65,85 to 65,0 on Mechanical 1
64,86 to 0,86 on Mechanical 1

## Text inside footprints (layer, text, board x,y; h text height)
H1: Mechanical 1 "PCB Edge" at 64.754,30.854 h0.6 r90
H2: Top Overlay "9" at 56.197,45.155 h0.6 r270; Top Overlay "10" at 58.737,45.155 h0.6 r270; Top Overlay "1" at 56.197,58.215 h0.6 r270; Top Overlay "2" at 58.737,58.715 h0.6 r270
H4: Top Overlay "1" at 1.233,47.084 h0.6
H5: Top Overlay "1" at 55.423,1.905 h0.6
P1: Top Overlay "20" at 15.24,79.248 h0.6; Top Overlay "19" at 15.367,81.915 h0.6; Top Overlay "1" at 43.561,82.169 h0.6; Top Overlay "2" at 43.434,79.248 h0.6
U3: Mechanical 13 "*" at 20.93,24.344 h0.6 r180
U6: Top Overlay "NO GND/ / POWER / PLANES / UNDER / OR NEARBY" at 2.123,72.331 h0.6